# Altium PCB PCB1.PcbDoc
Units mil, origin at the board's own origin, x right, y up, seen from the top; angles counter-clockwise.
Board outline 1889.76 x 708.66 mil, 2 copper layers (Top Layer, Bottom Layer); 31 components, 30 nets, 118 pads, 52 vias.
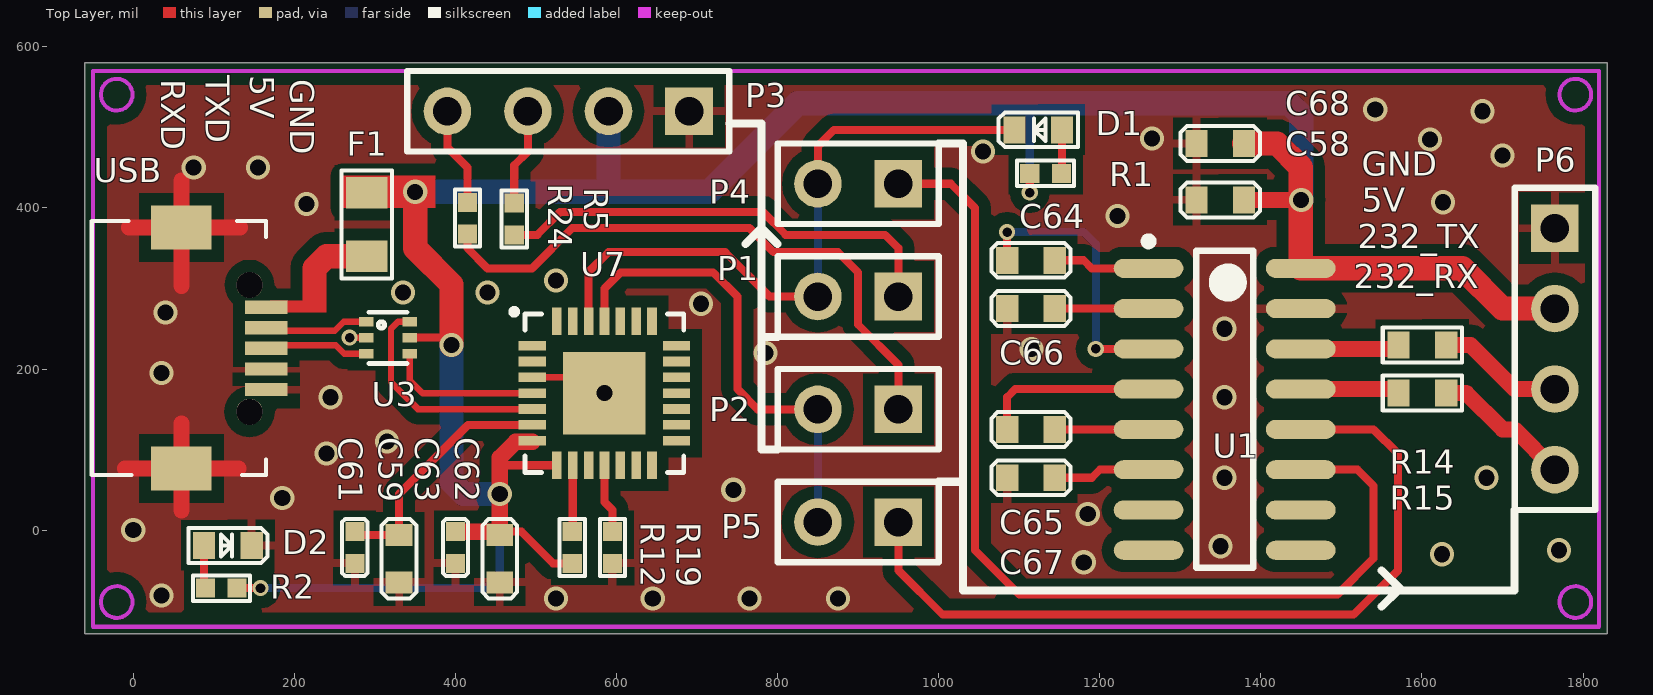
[diagram p0: Top Layer view]
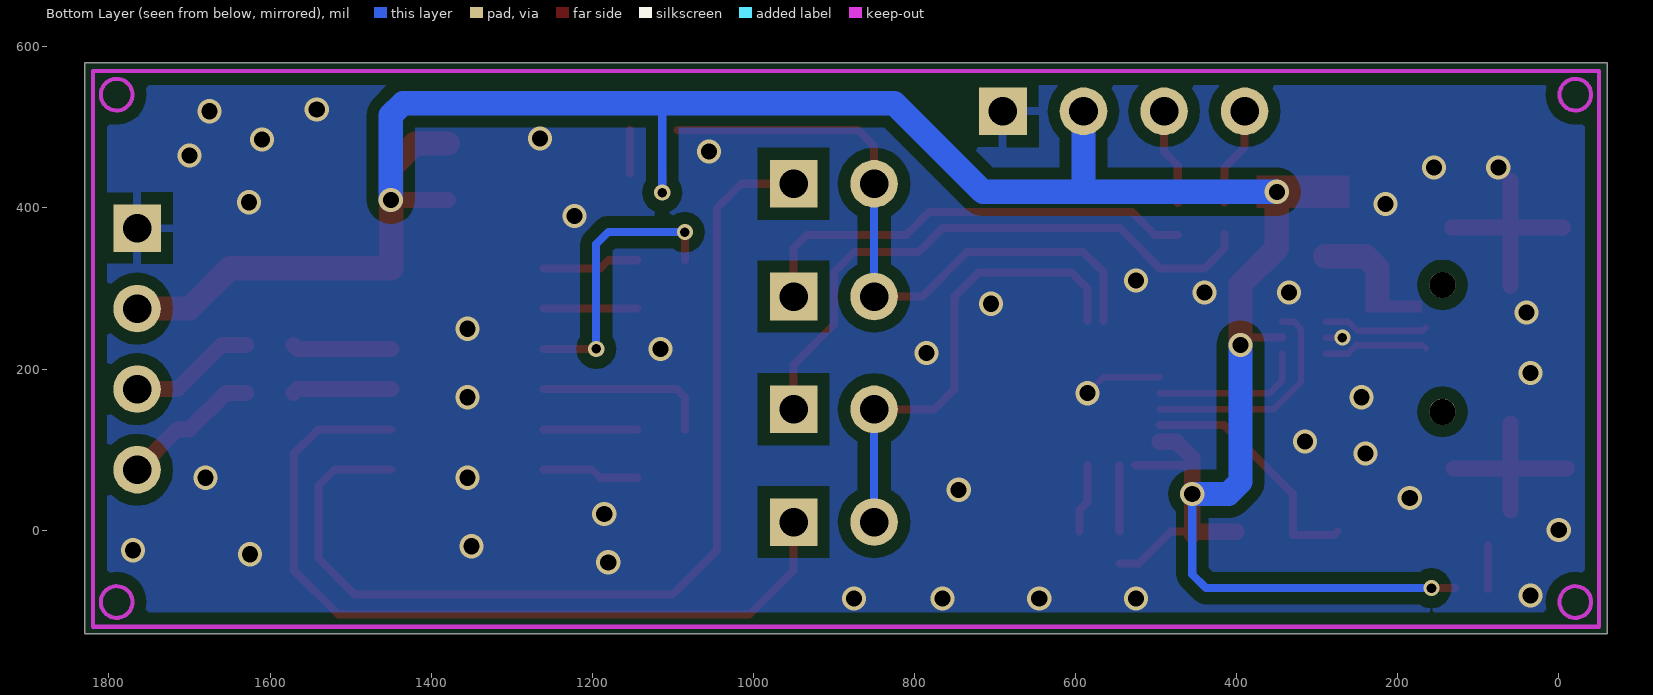
[diagram p1: Bottom Layer view, seen from below]

## Layer stack, top to bottom
Top Layer: signal copper 1.4
Dielectric: dielectric 12.6, FR-4, Dk 4.8
Bottom Layer: signal copper 1.4

## Board outline
-60,-128.66 -60,580 1829.76,580 1829.76,-128.66

## Design rules (kind name [scope] priority, off if disabled: settings)
Clearance [All] p1: gap=5
DiffPairsRouting [All] p1: maxlimit=10 minlimit=8 mostfreqgap=10 maxuncoupledlength=500
PolygonConnect [All] p1: connectstyle=Relief reliefconductorwidth=10 reliefentries=4 polygonreliefangle="90 Angle"
RoutingVias [All] p1: holewidth=28 width=50 viastyle="Through Hole" minholewidth=28 minwidth=50 maxholewidth=28 maxwidth=50
SilkscreenOverComponentPads [All] p1: minsilkscreentomaskgap=10
SolderMaskExpansion [All] p1: expansion=4
Width [All] p1: maxlimit=100 minlimit=8 preferedwidth=10
26 further rules are at their usual default settings.

## Classes and differential pairs
component class USB: C59 C61 C62 C63 D1 P1 P2 P4 P5 R1 R12 R19 U7
component class RS232: C64 C65 C66 C67 C68 P6 R14 R15 U1
component class Interface: C58 D2 F1 P3 R2 R5 R24 U3 USB
differential pair D: +D_P -D_N
differential pair DIN: +DIN_P -DIN_N

## Components (designator, comment, footprint, x,y, rotation, side; value= is the part's Value field where it differs from the comment)
C58 "10uF/25V" 0603C 1320,410 r0 top
C59 "4.7uF/25V" 0603C 330,-65 r90 top
C61 "0.1uF/50V" 0402C 275,-2.01 r270 top
C62 "10uF/25V" 0603C 455,-5.94 r270 top
C63 "0.1uF/50V" 0402C 400,-2.01 r270 top
C64 "0.1uF/50V" 0603C 1144.06,335 r180 top
C65 "0.1uF/50V" 0603C 1085,125 r0 top
C66 "0.1uF/50V" 0603C 1144.06,275 r180 top
C67 "0.1uF/50V" 0603C 1144.06,65 r180 top
C68 "0.1uF/50V" 0603C 1320,480 r0 top
D1 "LED0" 0603LED 1153,497 r180 top
D2 "LED0" 0603LED 88,-19 r0 top
F1 "1A" 0805R 290,340 r90 top
P1 "Header 2" HDR1X2 950,290 r180 top
P2 "Header 2" HDR1X2 950,150 r180 top
P3 "Header 4" HDR1X4 690,520 r180 top
P4 "Header 2" HDR1X2 950,430 r180 top
P5 "Header 2" HDR1X2 950,10 r180 top
P6 "Header 4" HDR1X4 1765,375 r270 top
R1 "1K" 0402R 1113,443 r0 top
R2 "1K" 0402R 129,-72 r180 top
R5 "22/5%/1/8W" 0402R 473,406 r270 top
R12 "1K/5%/1/8W" 0402R 545,-41.38 r90 top
R14 "1K" 0603R 1630,230 r180 top
R15 "1K" 0603R 1630,170 r180 top
R19 "10K/5%/1/8W" 0402R 595,-41.38 r90 top
R24 "22/5%/1/8W" 0402R 415,407 r270 top
U1 "MAX3232ESE+" SOIC127P600X265-16N 1355,150 r0 top
U3 "NUF2042XV6T1" SOT563-6 316,239 r270 top
U7 "CP2102" QFN28N5X5-0p5P-L 585,170 r0 top
USB "Header 5" Micro_USB_PH 165,225.67 r0 top

## Footprints (in the part's own frame and the unit in brackets; to place one, negate y for a bottom-side part, rotate by r counter-clockwise, add the part's x,y. Pads: shape width x height; smd on the part's side, far side on the other; paste and mask are expansions set on the pad)
0402C [mm]
  rect 0.6x0.6 smd: 1(0,0) 2(1,0)
  silkscreen extent -0.4,-0.4 1.4,0.4
0402R [mm]
  rect 0.6x0.6 smd: 1(0,0) 2(1,0)
  silkscreen extent -0.4,-0.4 1.4,0.4
0603C [mm]
  rect 0.7x0.85 smd: 1(0,0) 2(1.5,0)
  silkscreen extent -0.5,-0.55 2,0.55
0603LED [mm]
  rect 0.7x0.85 smd: 1(0,0) 2(1.5,0)
  silkscreen extent -0.5,-0.55 2,0.55
0603R [mm]
  rect 0.7x0.85 smd: 1(0,0) 2(1.5,0)
  silkscreen extent -0.5,-0.55 2,0.55
0805R [mm]
  rect 1x1.3 smd: 1(0,0) 2(2,0)
  silkscreen extent -0.7,-0.8 2.7,0.8
HDR1X2 [mm] "Connector; Header; 2 Position"
  rect 1.5x1.5 hole 0.9: 1(0,0)
  round 1.5 hole 0.9: 2(2.54,0)
  silkscreen extent -1.27,-1.27 3.81,1.27
HDR1X4 [mm] "Connector; Header; 4 Position"
  rect 1.5x1.5 hole 0.9: 1(0,0)
  round 1.5 hole 0.9: 2(2.54,0) 3(5.08,0) 4(7.62,0)
  silkscreen extent -1.27,-1.27 8.89,1.27
Micro_USB_PH [mm]
  rect 1.35x0.42 smd: 1(0,1.3) 2(0,0.65) 3(0,0) 4(0,-0.65) 5(0,-1.3)
  rect 1.9x1.4 smd: 6(-2.675,3.811) 9(-2.675,-3.789)
  round 0.82 hole 0.82 unplated: 7(-0.525,2) 8(-0.525,-2)
  silkscreen extent -5.5,-4 0,4.01
QFN28N5X5-0p5P-L [mil]
  rect 34x12 smd mask+5: 1(-89.5,59.06) 2(-89.5,39.37) 3(-89.5,19.68) 4(-89.5,0) 5(-89.5,-19.68) 6(-89.5,-39.37) 7(-89.5,-59.06) 15(89.5,-59.06) 16(89.5,-39.37) 17(89.5,-19.68) 18(89.5,0) 19(89.5,19.68) 20(89.5,39.37) 21(89.5,59.06)
  rect 12x34 smd mask+5: 8(-59.06,-89.5) 9(-39.37,-89.5) 10(-19.68,-89.5) 11(0,-89.5) 12(19.68,-89.5) 13(39.37,-89.5) 14(59.06,-89.5) 22(59.06,89.5) 23(39.37,89.5) 24(19.68,89.5) 25(0,89.5) 26(-19.68,89.5) 27(-39.37,89.5) 28(-59.06,89.5)
  rect 102.36x102.36 smd mask+5: 29(0,0)
  silkscreen extent -114,-98 98,103
SOIC127P600X265-16N [mm] "SOIC, 16-Leads, Body 10.0x4.0mm (max), Pitch 1.27mm, IPC Medium Density"
  oval 2.2x0.6 smd: 1(-2.4,4.445) 2(-2.4,3.175) 3(-2.4,1.905) 4(-2.4,0.635) 5(-2.4,-0.635) 6(-2.4,-1.905) 7(-2.4,-3.175) 8(-2.4,-4.445) 9(2.4,-4.445) 10(2.4,-3.175) 11(2.4,-1.905) 12(2.4,-0.635) 13(2.4,0.635) 14(2.4,1.905) 15(2.4,3.175) 16(2.4,4.445)
  silkscreen extent -2.52,-5 0.9,5.42, body extent -2,-5 2,5, height 2.65
SOT563-6 [mil] "SOT563-6"
  rect 12x18 smd: 1(-19.68,-26.57) 2(0,-26.57) 3(20,-26.57) 4(20,27) 5(0,27) 6(-19.68,27)
  silkscreen extent -31,-24 32,24

## Part data
C58 C59 C61 C62 C63: library part Cap, "Capacitor"
C64 C65 C66 C67 C68: library part C, "C"
D1 D2: "Typical INFRARED GaAs LED"
F1: library part "Fuse 1", "Fuse"
P1 P2 P4 P5: "Header, 2-Pin"
P3 P6: "Header, 4-Pin"
R1 R2 R5 R24: library part Resistor, "Resistor SMD - IEC symbol version"
R12 R14 R15 R19: library part Res2, "Resistor"
U7: "Imported"
USB: "Header, 5-Pin"

## Via types
v1: diameter 30, hole 20, Top Layer to Bottom Layer, tented both sides, 44 vias
v2: diameter 20, hole 12, Top Layer to Bottom Layer, tented both sides, 8 vias

## Nets (pads, with @x,y where several pads share a name; then routed paths per layer and width w, separated by ;. In a path a pad name is that pad's centre, name@x,y a point inside that pad or via, vN(x,y) a via of type N, cw(c..) or ccw(c..) an arc to the next point about the centre after c; other vN are vias at no path point)
COM0_RX: P6.4 R15.1 | length 174.4
  Top Layer w20: R15.1 1655,170 1700,125 1715,125 P6.4
COM0_TX: P6.3 R14.1 | length 157.8
  Top Layer w20: R14.1 1660,230 1715,175 P6.3
CP_RXD: P2.2 P5.2 U7.25 | length 591.6
  Top Layer w10: U7.25 585,300 605,320 720,320 750,290 750,175 775,150 P2.2
  Bottom Layer w10: P5.2 P2.2
CP_TXD: D1.2 P1.2 P4.2 U7.26 | length 817.7
  Top Layer w10: U7.26 565.32,320.32 590,345 735,345 790,290 P1.2 ; P4.2 850,477 870,497 D1.2
  Bottom Layer w10: P1.2 P4.2
D_N: U3.6 U7.5 | length 282.2
  Top Layer w8: U3.6 328.68,258.68 320,250 320,183.7 336.85,166.85 353.39,150.32 U7.5
D_P: U3.4 U7.4 | length 192
  Top Layer w8: U3.4 343,186.16 359.16,170 U7.4
DIN_N: U3.1 USB.2 | length 130.6
  Top Layer w8: USB.2 168.8,247.46 250,247.46 261.22,258.68 U3.1
DIN_P: U3.3 USB.3 | length 130.3
  Top Layer w8: USB.3 168.8,229.46 200,229.46 251.37,229.46 261.83,219 U3.3
GND: C58.1 C59.1 C61.2 C62.2 C63.2 C66.2 C67.2 C68.1 D2.2 P3.1 P6.1 R19.1 U1.15 U3.2 U7.3 U7.29 USB.4 USB.5 USB.6 USB.9 | length 630.4
  Top Layer w8: v2@273.7,239 U3.2 ; U7.3 565.32,189.68 v1(585,170)
  Top Layer w20: -10.49,76.49 USB.9 ; -5.3,375.7 USB.6 ; 59.68,24.68 USB.9 ; 59.68,132.32 USB.9 ; 59.68,303.32 USB.6 ; 59.68,433.68 USB.6 ; 130.51,76.49 USB.9 ; 132.7,375.7 USB.6
  other v1: 525,-85 645,-85 765,-85 875,-85 35,-81 1180,-40 1625,-30 1770,-25 1350,-20 0,0 1185,20 185,40 745,50 1355,65 1680,65 240,95 315,110 245,165 1355,165 35,195 785,220 1115,225 1355,250 40,270 705,281 335,295 440,295 525,310 1222,390 215,405 1626,407 75,450 155,450 1700,465 1055,470 1610,485 1265,486 1675,520 1542,522
  other v2: 268.7,239 268.7,239
NetC59_2: C59.2 C61.1 U7.6 | length 308.5
  Top Layer w10: C61.1 278.94,-5.94 C59.2 330,45 415.63,130.63 U7.6
NetC64_1: C64.1 U1.1 | length 120.6
  Top Layer w10: C64.1 1180,335 1190,325 U1.1
NetC64_2: C64.2 U1.3 | length 351.7
  Top Layer w10: C64.2 v2(1085,370) ; v2(1195,225) U1.3
  Bottom Layer w10: v2(1085,370) 1180,370 1195,355 v2@1195,220
  other v2: 1195,225 1085,370
NetC65_1: C65.1 U1.4 | length 219.7
  Top Layer w10: C65.1 1085,165 1095,175 U1.4
NetC65_2: C65.2 U1.5 | length 116.5
  Top Layer w10: C65.2 U1.5
NetC66_1: C66.1 U1.2 | length 116.5
  Top Layer w10: C66.1 U1.2
NetC67_1: C67.1 U1.6 | length 120.6
  Top Layer w10: C67.1 1190,65 1200,75 U1.6
NetD1_1: D1.1 R1.2 | length 54.3
  Top Layer w10: R1.2 1153,443.63 D1.1
NetD2_1: D2.1 R2.2 | length 54
  Top Layer w10: R2.2@88,-73 D2.1
NetF1_1: F1.1 USB.1 | length 111.2
  Top Layer w30: 225,285 225,325 240,340 F1.1
NetP3_3: P3.3 R5.1 | length 121
  Top Layer w10: R5.1 473,453 490,470 P3.3
NetP3_4: P3.4 R24.1 | length 123.4
  Top Layer w10: P3.4 390,475 415,450 R24.1
NetR12_2: R12.2 U7.9 | length 82.8
  Top Layer w10: R12.2 545.63,-1.38 U7.9
NetR14_2: R14.2 U1.14 | length 123.5
  Top Layer w20: U1.14 1565.94,225 R14.2
NetR15_2: R15.2 U1.13 | length 123.5
  Top Layer w20: U1.13 1565.94,175 R15.2
NetR19_2: R19.2 U7.11 | length 86.7
  Top Layer w10: U7.11 585,35 595,25 R19.2
RXD_USB: P2.1 R24.2 | length 747.2
  Top Layer w10: R24.2 415,350 440,325 495,325 545,375 765,375 795,345 875,345 900,320 900,255 950,205 P2.1
TXD_USB: P1.1 R5.2 | length 567.4
  Top Layer w10: R5.2 501.63,366.63 530,395 781.63,395 810,366.63 933.37,366.63 950,350 P1.1
UART2_RX: P5.1 U1.12 | length 1003.5
  Top Layer w10: P5.1 950,-50 1005,-105 1515,-105 1570,-50 1570,95 1540,125 U1.12
UART2_TX: P4.1 U1.11 | length 1257.6
  Top Layer w10: P4.1 1015,430 1045,400 1045,-25 1100,-80 1310,-80 1495,-80 1540,-35 1540,55 1520,75 U1.11
VCC: C58.2 C62.1 C63.1 C68.2 F1.2 P3.2 P6.2 R1.1 R2.1 R12.1 U1.16 U3.5 U7.7 U7.8 | length 3435.2
  Top Layer w10: R2.1 v2(158,-72) ; U3.5 355,239 ; 364,239 355,239 ; v1(395,230) 386,239 355,239 ; C62.1@451.06,-2.01 455,-2.01 482.01,-2.01 521.38,-41.38 R12.1 ; 455,75 460.5,80.5 U7.8 ; U7.7@495.5,109.63 U7.7 ; v2(1113,419) R1.1
  Top Layer w20: C63.1 451.06,-2.01 C62.1 455,-2.01 v1(455,45) 455,75 455,90 474.63,109.63 U7.7@495.5,109.63 ; C58.2 v1@1449.49,410
  Top Layer w30: v1(350,420) 350,350 395,305 v1(395,230) ; C68.2 1420,480 1449.49,450.51 1449.49,410 U1.16 1650,325 1700,275 P6.2
  Bottom Layer w10: v2(158,-72) 438,-72 455,-55 v1(455,45) ; v2(1113,419) 1113,530
  Bottom Layer w30: v1(350,420) 590,420 ; v1(395,230) 395,60 410,45 v1(455,45) ; P3.2 590,420 ; v1(1450,410) 1450,515 1435,530 1113,530 825,530 715,420 590,420
pads on no net: U1.7 U1.8 U1.9 U1.10 U7.1 U7.2 U7.10 U7.12 U7.13 U7.14 U7.15 U7.16 U7.17 U7.18 U7.19 U7.20 U7.21 U7.22 U7.23 U7.24 U7.27 U7.28 USB.7 USB.8

## Polygon pours and split planes (outlines as drawn)
GND on Top Layer "Mid-Layer 1-No Net" (solid, remove dead copper, pour order 1000): -106.47,595.53 1878.53,595.53 1848.53,565.53 1848.53,-164.47 -91.47,-164.47 -126.47,-129.47 -101.47,-104.47 -101.47,605.53
GND on Bottom Layer "Mid-Layer 1-No Net" (solid, remove dead copper, pour order 1001): -97.62,604.38 1827.38,604.38 1837.38,614.38 1837.38,-140.62 -97.62,-140.62 -102.62,-135.62 -97.62,-130.62 -97.62,604.38

## Keep-outs
Keep-Out Layer:
  circle w5: c1790.39,540.63 r19.68
  circle w5: c1790.39,-89.29 r19.68
  circle w5: c-20.63,-89.29 r19.68
  circle w5: c-20.63,540.63 r19.68
  lines w5: -50,-120 1820,-120 1820,570 -50,570 -50,-120

## Other copper
Top Layer:
  rectangle net NetF1_1: 170,270 240,285
  rectangle net VCC: 260,400 375,440

## Silkscreen, mask and mechanical layers (free items; w line width, h text height)
Top Overlay:
  lines w10: 740,505 780,505 780,240 ; 760,355 780,375 ; 780,380 780,375 ; 800,100 780,100 780,240 ; 800,240 780,240 ; 800,355 780,375 ; 1000,60 1030,60 ; 1000,480 1030,480 1030,-75 1715,-75 1715,25 ; 1550,-95 1570,-75 1575,-75 ; 1550,-50 1575,-75 ; 1630,-75 1575,-75
  text "TXD" at 90,565 h30 r270
  text "5V" at 145,565 h30 r270
  text "RXD" at 35,560 h30 r270
  text "GND" at 195,560 h30 r270
  text "GND" at 1525,440 h30
  text "5V" at 1525,395 h30
  text "232_TX" at 1520,350 h30
  text "232_RX" at 1515,300 h30
Mechanical 1:
  circle w5: c-20.63,540.63 r19.68
  circle w5: c-20.63,-89.29 r19.68
  circle w5: c1790.39,-89.29 r19.68
  circle w5: c1790.39,540.63 r19.68
  lines w5: -60,-128.66 -60,580 1829.76,580 1829.76,-128.66 -60,-128.66